# EAGLE board OneLedBlinkerWith100kPot (EAGLE 7.6.0)
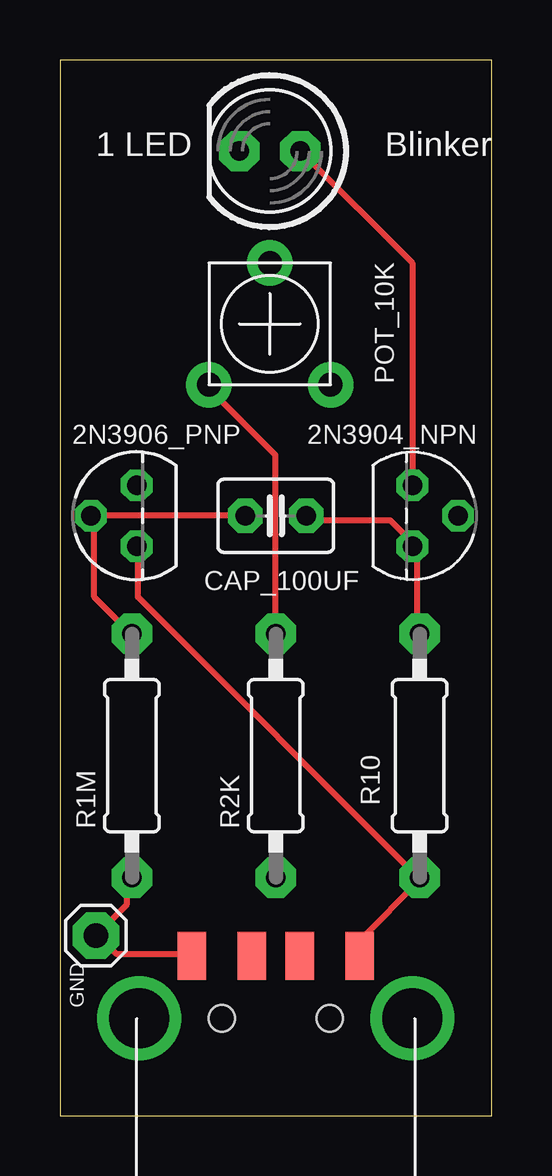
[diagram p0: board, top side]
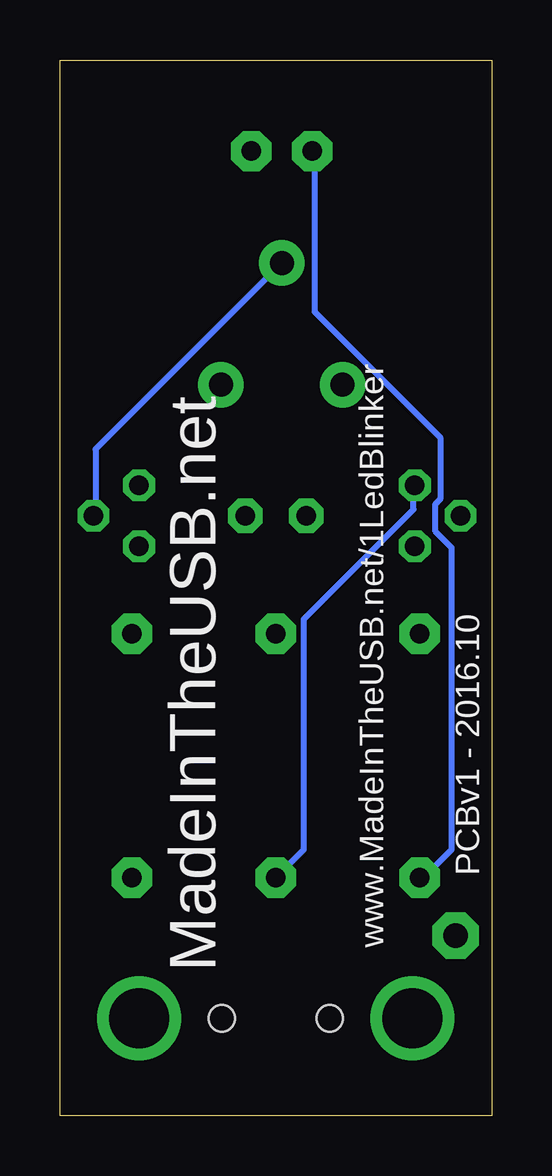
[diagram p1: board, bottom side, seen from below]

Size 18 x 44 mm. Coordinates in mm from the lower left corner, seen from the top.
Outline: 0,0 18,0 18,44 0,44 0,0
Copper layers (1*16): Top 0.035mm / dielectric 1.5mm / Bottom 0.035mm
Design rules "default": minimum track width 10mil, minimum drill 24mil, track to track 8mil, track to pad 8mil, pad to pad 8mil, via to via 8mil, smd to smd 8mil, copper to edge 40mil, drill to drill 8mil, minimum pad ring 10mil, minimum via ring 8mil, stop-mask expansion 4mil, vias tented up to drill 0mil, thermal gap 10mil

## Footprints (pad centres in the part's own frame; a part is rotated, then mirrored left to right if it is on the bottom)
TO92 = drill 0.813 octagon: 1 1.27,0; 2 0,1.905; 3 -1.27,0
C025-030X050 = drill 0.813 pad 1.422 octagon: 1 -1.27,0; 2 1.27,0
1X01 = drill 1.016 pad 1.93 octagon: 1 0,0
LED5MM = drill 0.813 pad 1.676 octagon: A -1.27,0; K 1.27,0
TRIM_POT_PTH = drill 1 pad 1.88: 1 -2.54,-2.54; 2 0,2.54; 3 2.54,-2.54
0207/10 = drill 0.813 pad 1.676 octagon: 1 -5.08,0; 2 5.08,0
MOLEX_480371000 = smd 1.2 x 2: 1 3.5,2.6; 2 1,2.6; 3 -1,2.6; 4 -3.5,2.6 | drill 2.5: M1 -5.7,0; M2 5.7,0 | hole 1.1: -2.25,0; 2.25,0

## Placement (x,y rotation side)
2N3904_NPN  2N3904  [TO92]  14.7,25 270 top
2N3906_PNP  2N3906  [TO92]  3.2,25 90 top
CAP_100UF  [C025-030X050]  9,25 0 top
GND  GND  [1X01]  1.5,7.5 0 top
LED1  [LED5MM]  8.75,40.2 180 top
POT_10K  [TRIM_POT_PTH]  8.75,33 0 top
R1M  [0207/10]  3,15 90 top
R2K  [0207/10]  9,15 90 top
R10  [0207/10]  15,15 270 top
X1  USB-A  [MOLEX_480371000]  9,4.05 0 top

## Library data of the parts
2N3904_NPN = transistor
2N3906_PNP = transistor-pnp
CAP_100UF GND LED1 R1M R2K R10 X1 = adafruit
POT_10K = SparkFun-Electromechanical

## Nets
N$1: 2N3906_PNP.3 R10.2 X1.1
N$2: 2N3904_NPN.1 CAP_100UF.2 R10.1
N$3: 2N3904_NPN.3 LED1.A
N$4: GND.1 LED1.K R1M.1 X1.4
N$5: 2N3906_PNP.2 CAP_100UF.1 R1M.2
N$6: 2N3906_PNP.1 R2K.1
N$7: POT_10K.1 R2K.2
N$8: 2N3904_NPN.2 POT_10K.2

## Tracks (layer width: path | path; a pad name or v marks a point on that pad's centre or on a via)
N$1
  Top 0.254: X1.1 12.63,6.75 12.63,7.43 14.92,9.72 R10.2 14.92,9.95 3.26,21.6 3.26,23.66 2N3906_PNP.3
N$2
  Top 0.254: R10.1 14.92,20.23 14.92,23.66 2N3904_NPN.1 14.69,23.89 13.77,24.8 10.34,24.8 CAP_100UF.2
N$3
  Top 0.254: 2N3904_NPN.3 14.69,26.41 14.69,35.55 10.12,40.12 LED1.A
N$4
  Top 0.254: X1.4 5.32,6.75 2.34,6.75 1.66,7.43 GND.1 1.66,7.66 2.8,8.8 2.8,9.72 R1M.1
  Bottom 0.254: LED1.K 7.37,40.12 7.37,33.49 2.12,28.23 2.12,25.72 2.34,25.49 2.34,24.35 1.66,23.66 1.66,11.09 2.8,9.95 R1M.1
N$5
  Top 0.254: R1M.2 2.8,20.23 1.43,21.6 1.43,24.8 2N3906_PNP.2 1.43,25.03 7.6,25.03 CAP_100UF.1
N$6
  Bottom 0.254: 2N3906_PNP.1 3.26,26.18 3.26,25.26 7.83,20.69 7.83,11.09 8.97,9.95 R2K.1
N$7
  Top 0.254: R2K.2 8.97,20.23 8.97,27.55 6.23,30.29 POT_10K.1
N$8
  Bottom 0.254: 2N3904_NPN.2 16.52,25.03 16.52,27.78 8.97,35.32 POT_10K.2

## Text on the board
tNames: 1 LED | Blinker
bNames: PCBv1 - 2016.10 | www.MadeInTheUSB.net/1LedBlinker | MadeInTheUSB.net